# Altium PCB hall.PcbDoc
Units mm, origin at the board's own origin, x right, y up, seen from the top; angles counter-clockwise.
Board outline 24 x 24 mm, 2 copper layers (Top Layer, Bottom Layer), stack 1.571 mm thick; 7 components, 7 nets, 28 pads, 12 vias.
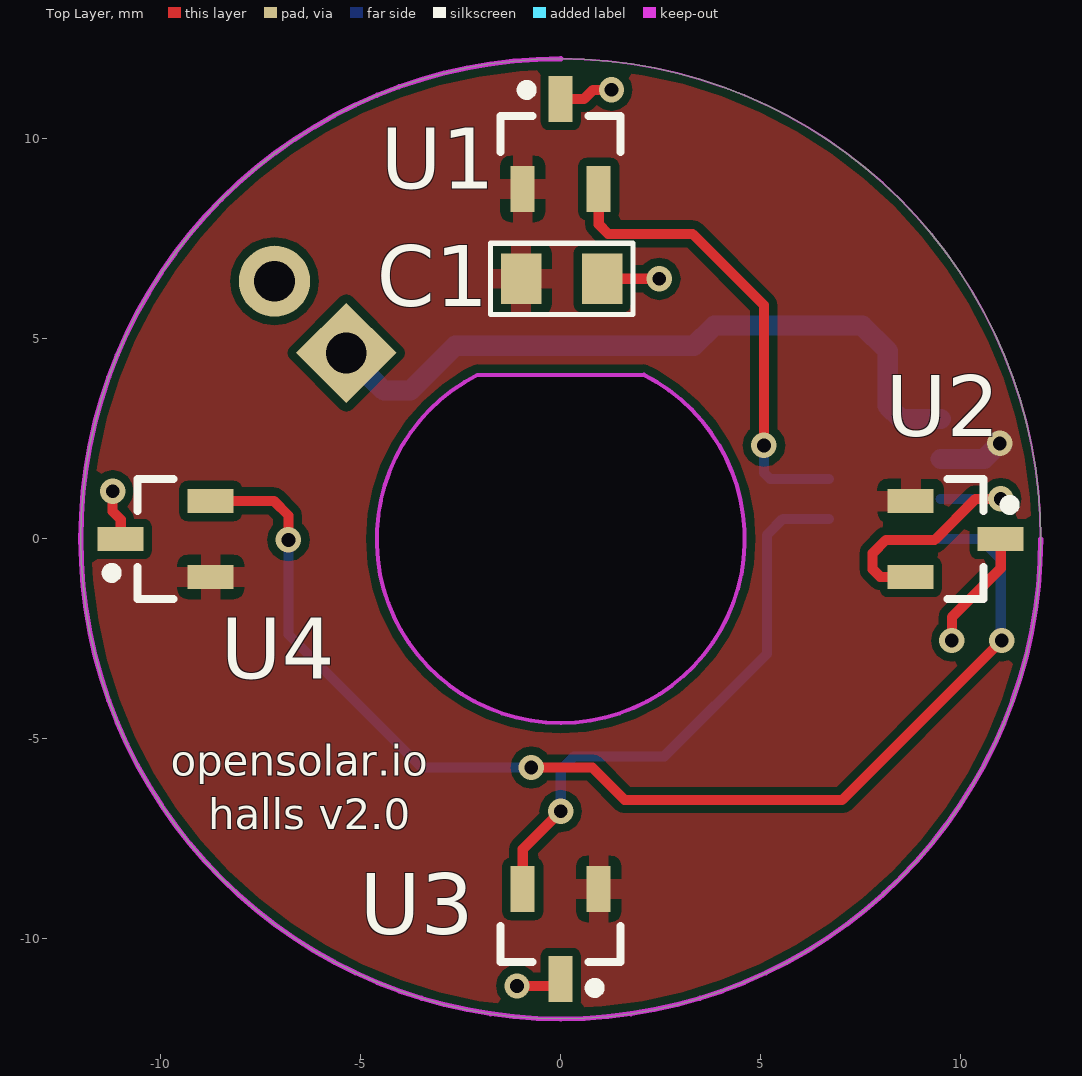
[diagram p0: Top Layer view]
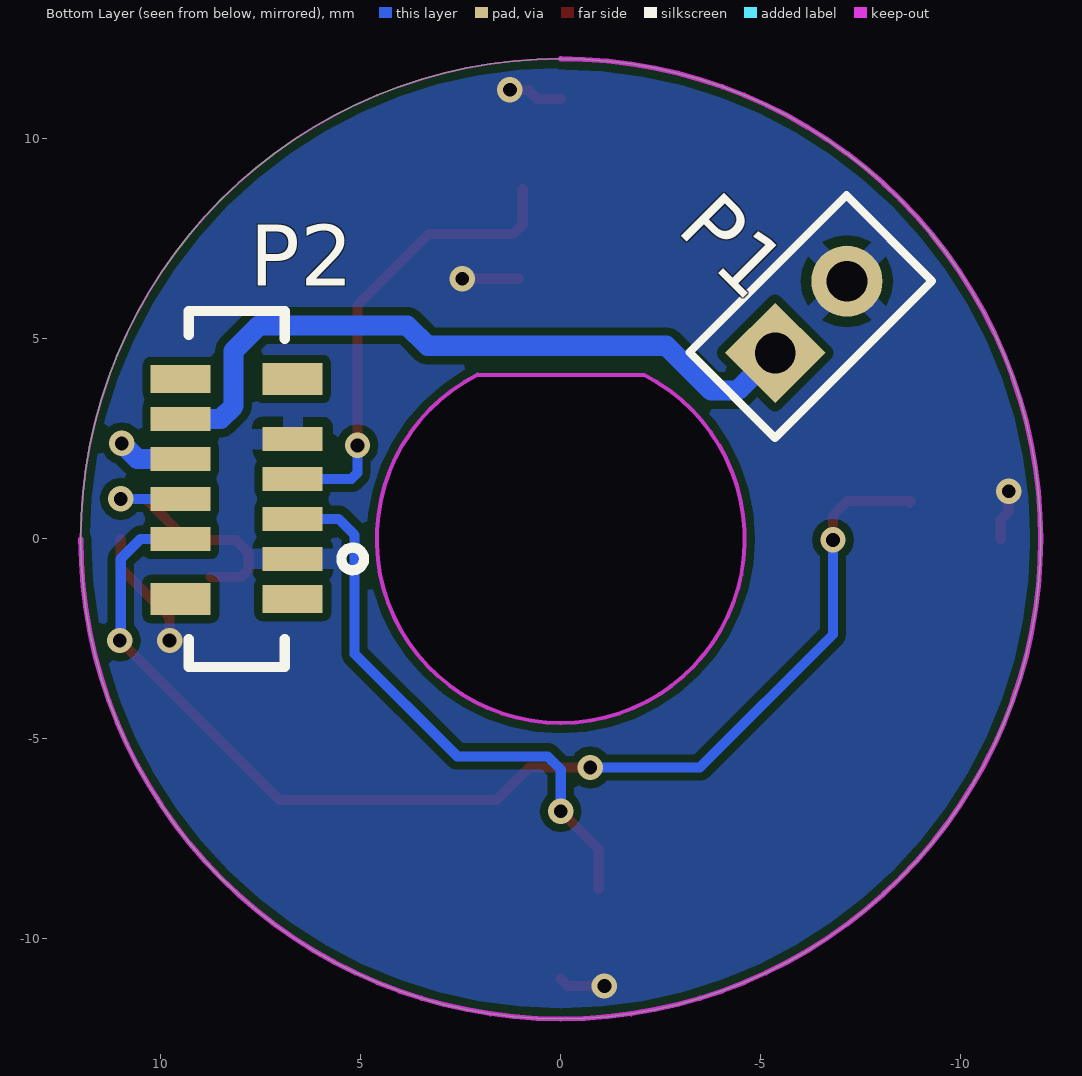
[diagram p1: Bottom Layer view, seen from below]

## Layer stack, top to bottom
Top Solder: solder mask 0.0102, Solder Resist, Dk 3.5
Top Layer: signal copper 0.0356
Dielectric 1: dielectric 1.5, FR-4, Dk 4.8
Bottom Layer: signal copper 0.0356
Bottom Solder: solder mask 0.0102, Solder Resist, Dk 3.5

## Board outline
-12,0 ccw(c0,0) 0,-12 ccw(c0,0) 12,0 12,0.005 ccw(c0,0.005) 0,12.005 ccw(c0,0.005)
cut-out: -2.079,4.103 ccw(c0,0) 2.077,4.104 2.077,4.1

## Design rules (kind name [scope] priority, off if disabled: settings)
BoardOutlineClearance [All] p1: gap=0.2 ignorepadtopadclearanceinfootprint=FALSE except(0.4: Arc-SplitBarrior Arc-SplitContinuation Track-SplitBarrior Track-SplitContinuation SMDPad-SplitBarrior SMDPad-SplitContinuation THPad-SplitBarrior THPad-SplitContinuation Via-SplitBarrior Via-SplitContinuation Fill-SplitBarrior Fill-SplitContinuation Poly-SplitBarrior Poly-SplitContinuation Region-SplitBarrior Region-SplitContinuation Text-SplitBarrior Text-SplitContinuation)
Clearance "Clearance Bottom Layer" [OnLayer('Bottom Layer')] p1: gap=0.203 ignorepadtopadclearanceinfootprint=TRUE except(0.254: Arc-Text Track-Text SMDPad-Text THPad-Text Via-Text Fill-Text Poly-Text Region-Text Text-Text)
Clearance "Clearance Top Layer" [OnLayer('Top Layer')] p2: gap=0.203 ignorepadtopadclearanceinfootprint=TRUE except(0.254: Arc-Text Track-Text SMDPad-Text THPad-Text Via-Text Fill-Text Poly-Text Region-Text Text-Text)
Clearance [All] p3: gap=0.2 ignorepadtopadclearanceinfootprint=FALSE except(0.089: Arc-Arc Arc-Track Arc-SMDPad Track-Track Track-SMDPad SMDPad-SMDPad; 0.127: Arc-Via Track-Via SMDPad-Via THPad-Via Via-Via; 0.254: Arc-Text Track-Text SMDPad-Text THPad-Text Via-Text Fill-Text Poly-Text Region-Text Text-Text)
HoleSize [All] p1: absolutevalues=TRUE maxlimit=6.3 minlimit=0.2 maxpercent=80.000 minpercent=20.000
MinimumAnnularRing [All] p1: minimumring=0.076
MinimumSolderMaskSliver [All] p1: minsoldermaskwidth=0.1
PolygonConnect PolygonConnect_1 [All] p1: thpad.connectstyle=Relief thpad.reliefconductorwidth=0.508 thpad.reliefentries=4 thpad.polygonreliefangle="90 Angle" thpad.airgapwidth=0.254 smdpad.connectstyle=Relief smdpad.reliefconductorwidth=0.508 smdpad.reliefentries=4 smdpad.polygonreliefangle="90 Angle" smdpad.airgapwidth=0.254 via.connectstyle=Direct via.reliefconductorwidth=0.508 via.reliefentries=4 via.polygonreliefangle="90 Angle" via.airgapwidth=0.254
RoutingCorners [All] p1: cornerstyle=Round minsetback=2.54 maxsetback=2.54
RoutingVias [All] p1: holewidth=0.5 width=1 viastyle="Through Hole" minholewidth=0.2 minwidth=0.45 maxholewidth=1 maxwidth=2
SilkToSilkClearance [All] p1: silktosilkclearance=0.1
SilkToSolderMaskClearance [IsPad] p1: minsilkscreentomaskgap=0.1 clearancetoexposedcopper=TRUE
SolderMaskExpansion [All] p1: expansion=0.102
Width [All] p1: maxlimit=2.54 minlimit=0.089 preferedwidth=0.381
25 further rules are at their usual default settings.

## Components (designator, comment, footprint, x,y, rotation, side; value= is the part's Value field where it differs from the comment)
C1 "1u" 0805C-TBD -0.737,6.502 r0 top
P1 "PV" HEADER-1X2 -5.359,4.648 r45 bottom
P2 "0525590853" FFC_8 6.7,-1.5 r90 bottom
U1 "AH49ENTR-G1" SOT23_AH49E 0,9.875 r90 top
U2 "AH49ENTR-G1" SOT23_AH49E 9.875,0 r0 top
U3 "AH49ENTR-G1" SOT23_AH49E 0,-9.875 r270 top
U4 "AH49ENTR-G1" SOT23_AH49E -9.875,0 r180 top

## Footprints (in the part's own frame and the unit in brackets; to place one, negate y for a bottom-side part, rotate by r counter-clockwise, add the part's x,y. Pads: shape width x height; smd on the part's side, far side on the other; paste and mask are expansions set on the pad)
0805C-TBD [mil] "CAPACITOR 0805"
  rect 40x50 smd: 1(-10,0) 2(70,0)
  silkscreen extent -40,-35 100,35, body extent -11,-25 70,25, height 26
FFC_8 [mm]
  rect 0.6x1.5 smd: 1(1,0) 2(1.5,2.8) 3(2,0) 4(2.5,2.8) 5(3,0) 6(3.5,2.8) 7(4,0) 8(4.5,2.8)
  rect 0.7x1.5 smd: 9(5.5,2.8) 12(0,0)
  rect 0.8x1.5 smd: 10(5.5,0) 11(0,2.8)
  silkscreen extent -1.7,-1.78 7.2,2.6, body extent -1.7,0.2 7.2,2.6, height 4
HEADER-1X2 [mil]
  rect 70x70 hole 40: 1(0,0)
  round 70 hole 40: 2(0,-100)
  silkscreen extent -59,-159 60,59, body extent -50,-150 50,50, height 315
SOT23_AH49E [mm] "SOT23, 3-Leads, Body 2.9x1.3mm, Pitch 0.95mm, Lead Span 2.3mm - Reverse Pinning, IPC Medium Density"
  rect 1.15x0.6 smd: 1(-1.125,0.95) 2(-1.125,-0.95) 3(1.125,0)
  silkscreen extent -0.2,-1.5 1.47,1.5, body extent -0.7,-1.5 0.7,1.5, height 1.1

## Part data
C1: library part 0805C-TBD, "CAPACITOR 0805 CERAMIC VALUE TO BE DETERMINED"
P1: library part "Header 2", "Header, 2-Pin", LatestRevisionDate=17-Jul-2002, LatestRevisionNote="Re-released for DXP Platform.", Publisher="Altium Limited"
P2: library part "Header 8", "Header, 8-Pin", LatestRevisionDate=17-Jul-2002, LatestRevisionNote="Re-released for DXP Platform.", Publisher="Altium Limited"
U1 U2 U3 U4: library part SI7211-B-00, "Hall effect analog sensor"

## Via types
v1: diameter 0.635, hole 0.343, Top Layer to Bottom Layer, 12 vias

## Nets (pads, with @x,y where several pads share a name; then routed paths per layer and width w, separated by ;. In a path a pad name is that pad's centre, name@x,y a point inside that pad or via, vN(x,y) a via of type N, cw(c..) or ccw(c..) an arc to the next point about the centre after c; other vN are vias at no path point)
GND: C1.2 P1.2 P2.1 P2.7 U1.3 U2.3 U3.3 U4.3 | length 8.3
  Top Layer w0.254: v1(-11.201,1.194) -11.201,0.686 -11,0.484 U4.3 ; v1(-1.092,-11.176) -0.176,-11.176 U3.3 ; U1.3 0.586,11 0.813,11.227 v1(1.27,11.227) ; C1.2 v1(2.464,6.502) ; v1(9.779,-2.54) 9.779,-1.956 11,-0.735 U2.3
NetP2_2: P2.2 U4.2 | length 30
  Top Layer w0.254: U4.2@-8.714,0.914 U4.2 -7.173,0.95 -6.807,0.584 v1(-6.807,-0.025) ; v1(-0.737,-5.715) 0.787,-5.715 1.6,-6.528 7.036,-6.528 v1(11.024,-2.54)
  Bottom Layer w0.254: v1(-6.807,-0.025) -6.807,-2.388 -3.48,-5.715 v1(-0.737,-5.715) ; P2.2 10.5,0 11,-0.5 v1@11,-2.5
NetP2_3: P2.3 U3.2 | length 14.4
  Top Layer w0.254: U3.2 -0.95,-7.757 v1(0,-6.807)
  Bottom Layer w0.254: v1(0,-6.807) 0,-5.766 0.33,-5.436 2.591,-5.436 5.156,-2.87 5.156,0.102 5.555,0.5 P2.3
NetP2_4: P2.4 U2.2 | length 6.7
  Top Layer w0.254: U2.2 7.986,-0.95 7.798,-0.762 7.798,-0.356 8.128,-0.025 9.347,-0.025 10.373,1 v1(11,1)
  Bottom Layer w0.254: P2.4 v1(11,1)
NetP2_5: P2.5 U1.2 | length 11.7
  Top Layer w0.254: U1.2 0.95,7.864 1.189,7.625 3.297,7.625 5.08,5.842 v1(5.08,2.337)
  Bottom Layer w0.254: v1(5.08,2.337) 5.08,1.651 5.231,1.5 P2.5
PV: P1.1 P2.8 | length 17.7
  Bottom Layer w0.508: P1.1 -4.42,3.708 -3.759,3.708 -2.642,4.826 3.327,4.826 3.835,5.334 7.544,5.334 8.179,4.699 8.179,3.321 8.5,3 P2.8
VDD: C1.1 P2.6 U1.1 U2.1 U3.1 U4.1 | length 1.6
  Bottom Layer w0.508: P2.6 10.585,2 v1(10.973,2.388)
pads on no net: P2.9 P2.10 P2.11 P2.12

## Polygon pours and split planes (outlines as drawn)
VDD on Top Layer "VDD_Plane" (solid, pour order 3): -12,0 ccw(c0,0) 0,-12 ccw(c0,0) 12,0 12,0.005 ccw(c0,0.005) 0,12.005 ccw(c0.002,0.002)
GND on Bottom Layer "gndplane" (solid, pour order 4): -12,0 ccw(c0,0) 0,-12 ccw(c0,0) 12,0 12,0.005 ccw(c0,0.005) 0,12.005 ccw(c0.002,0.002)

## Keep-outs
Keep-Out Layer:
  lines w0.051: 0,12.005 cw(c0,0.005) 12,0.005
  lines w0.1: -2.079,4.103 ccw(c0,0) 2.077,4.104 ; -2.077,4.1 2.077,4.1
  lines w0.127: -12,0 ccw(c0,0) 0,-12 ccw(c0,0) 12,0 ; -12,0.005 cw(c0,0.005) 0,12.005

## Silkscreen, mask and mechanical layers (free items; w line width, h text height)
Top Overlay:
  text "opensolar.io" at -9.754,-5.918 h0.76
  text "halls v2.0" at -8.814,-7.264 h0.76